# Altium PCB Placa de alimentação.PcbDoc
Units mm, origin at the board's own origin, x right, y up, seen from the top; angles counter-clockwise.
Board outline 62.09 x 55.59 mm, 2 copper layers (Top Layer, Bottom Layer); 20 components, 10 nets, 43 pads, 2 vias.
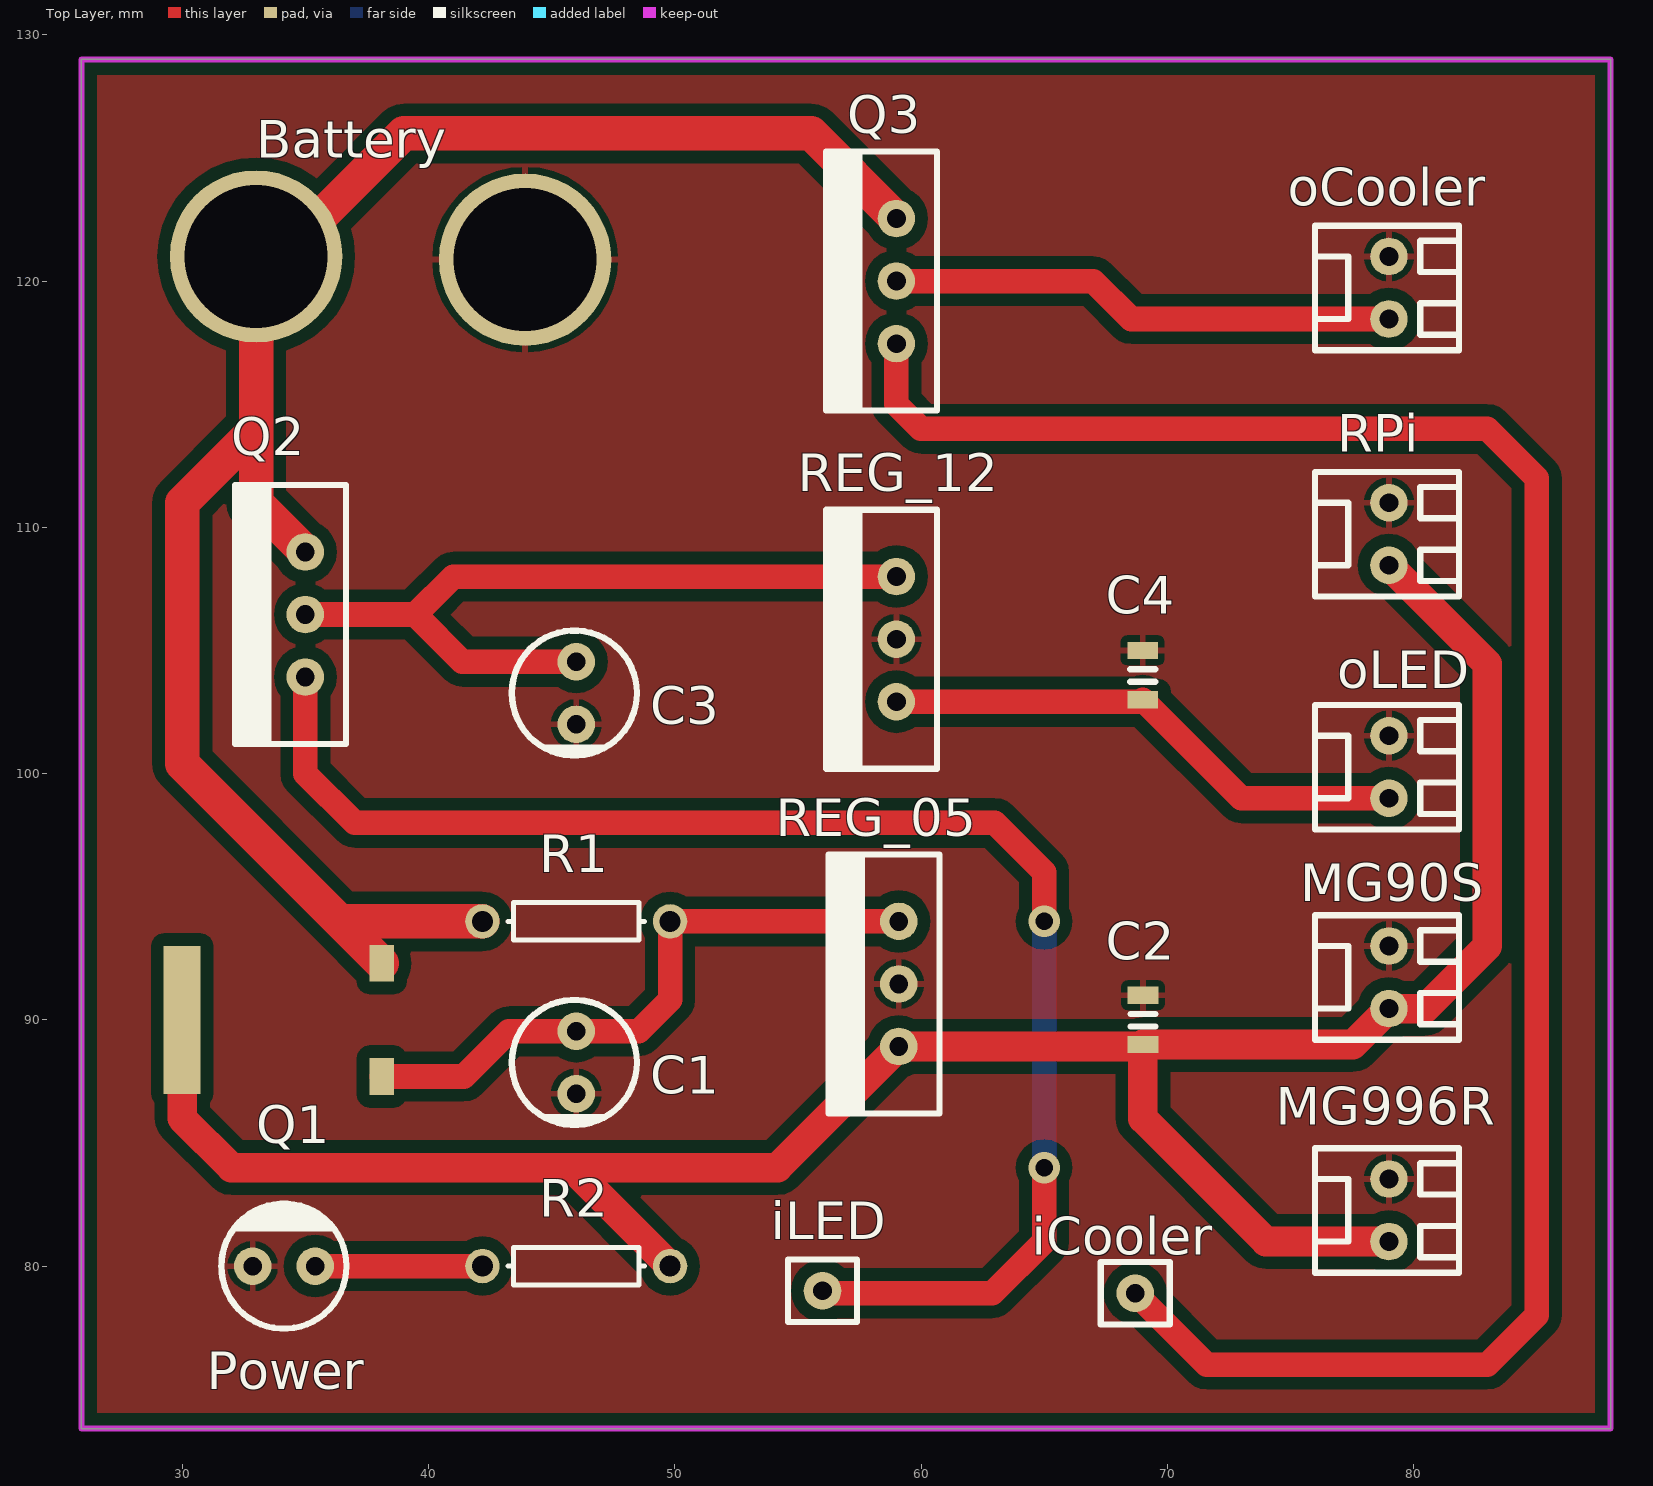
[diagram p0: Top Layer view]
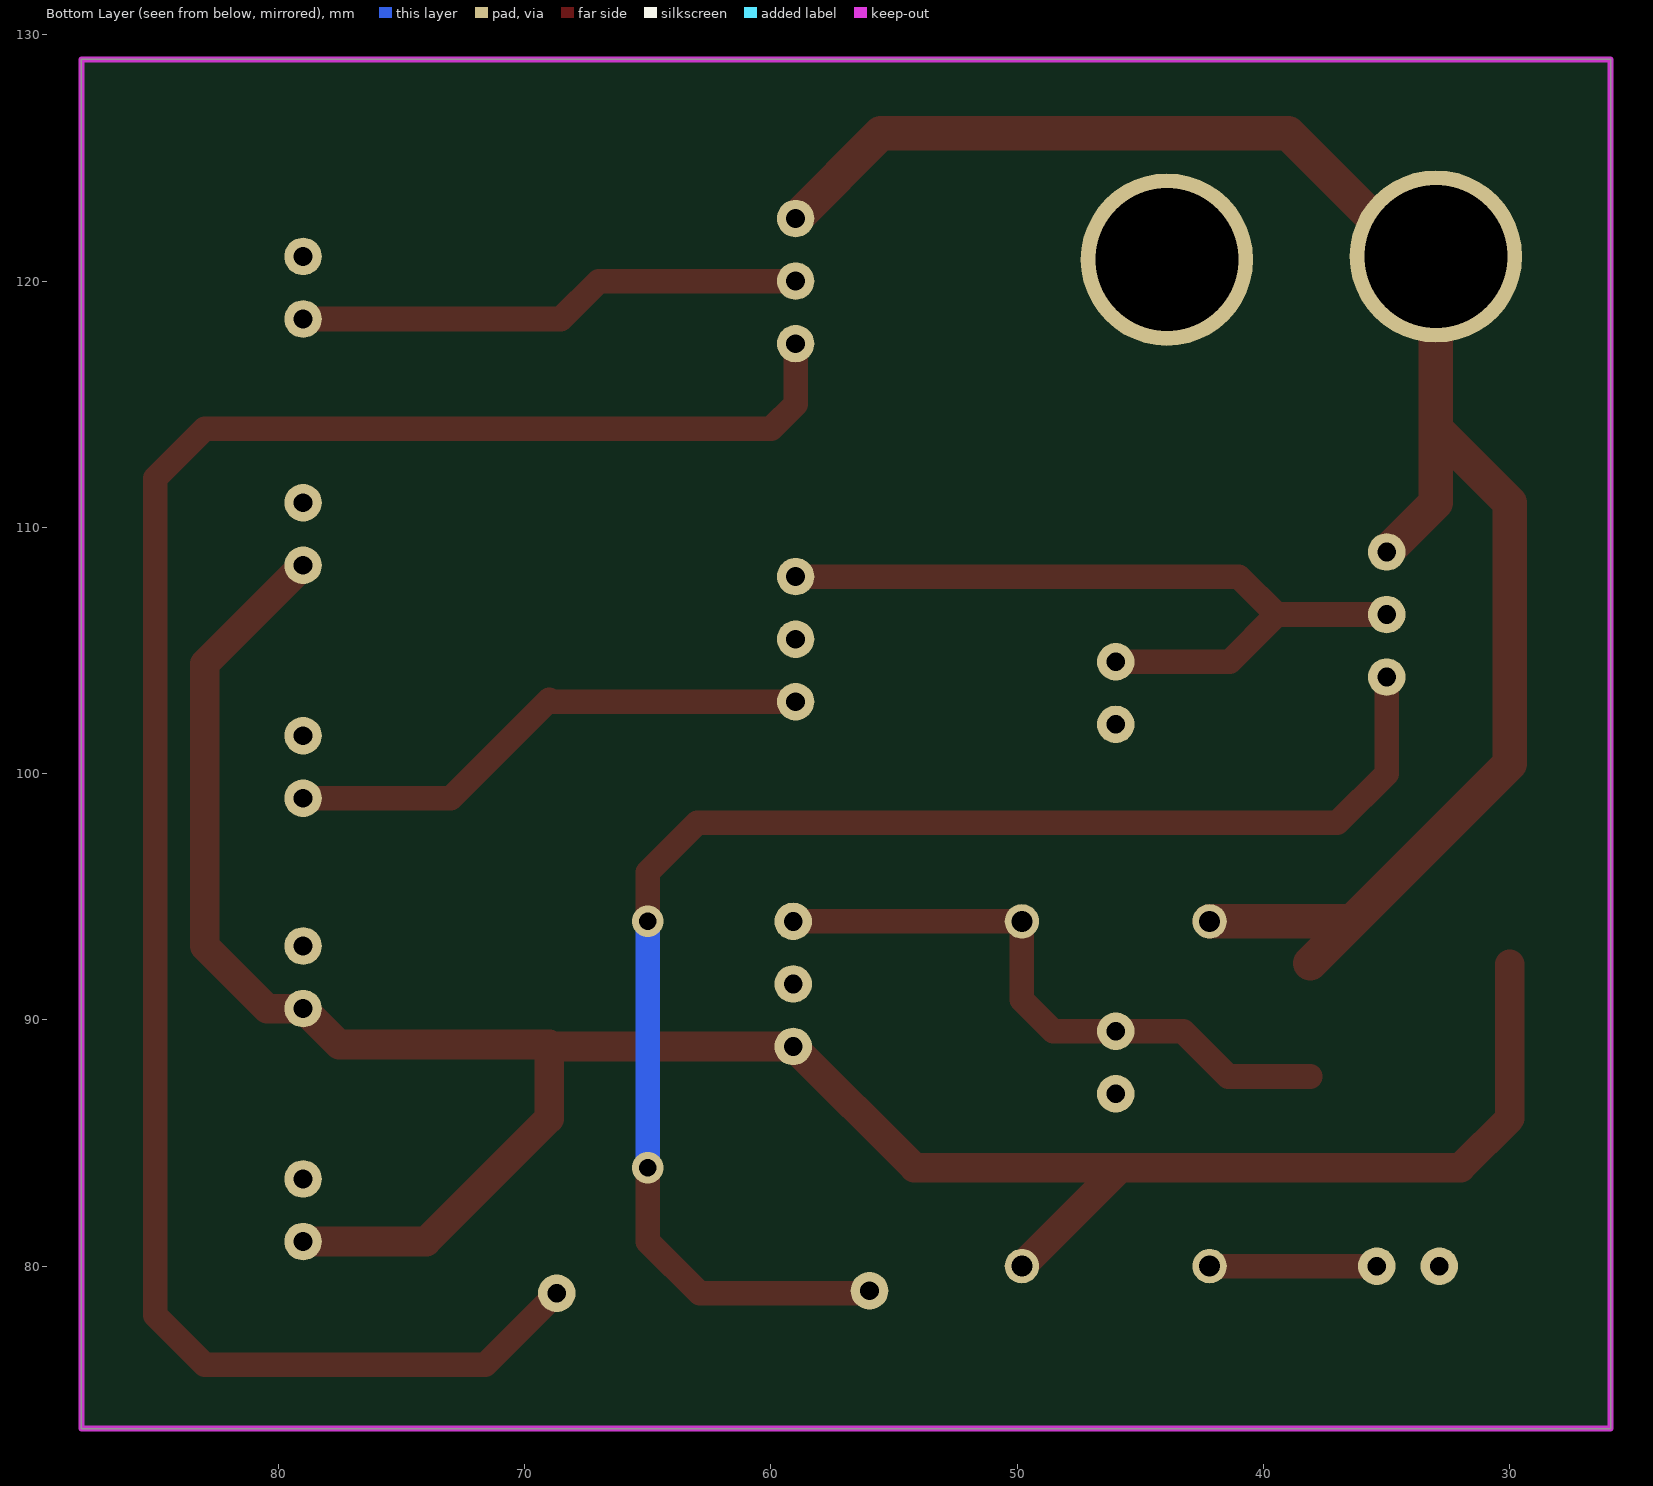
[diagram p1: Bottom Layer view, seen from below]
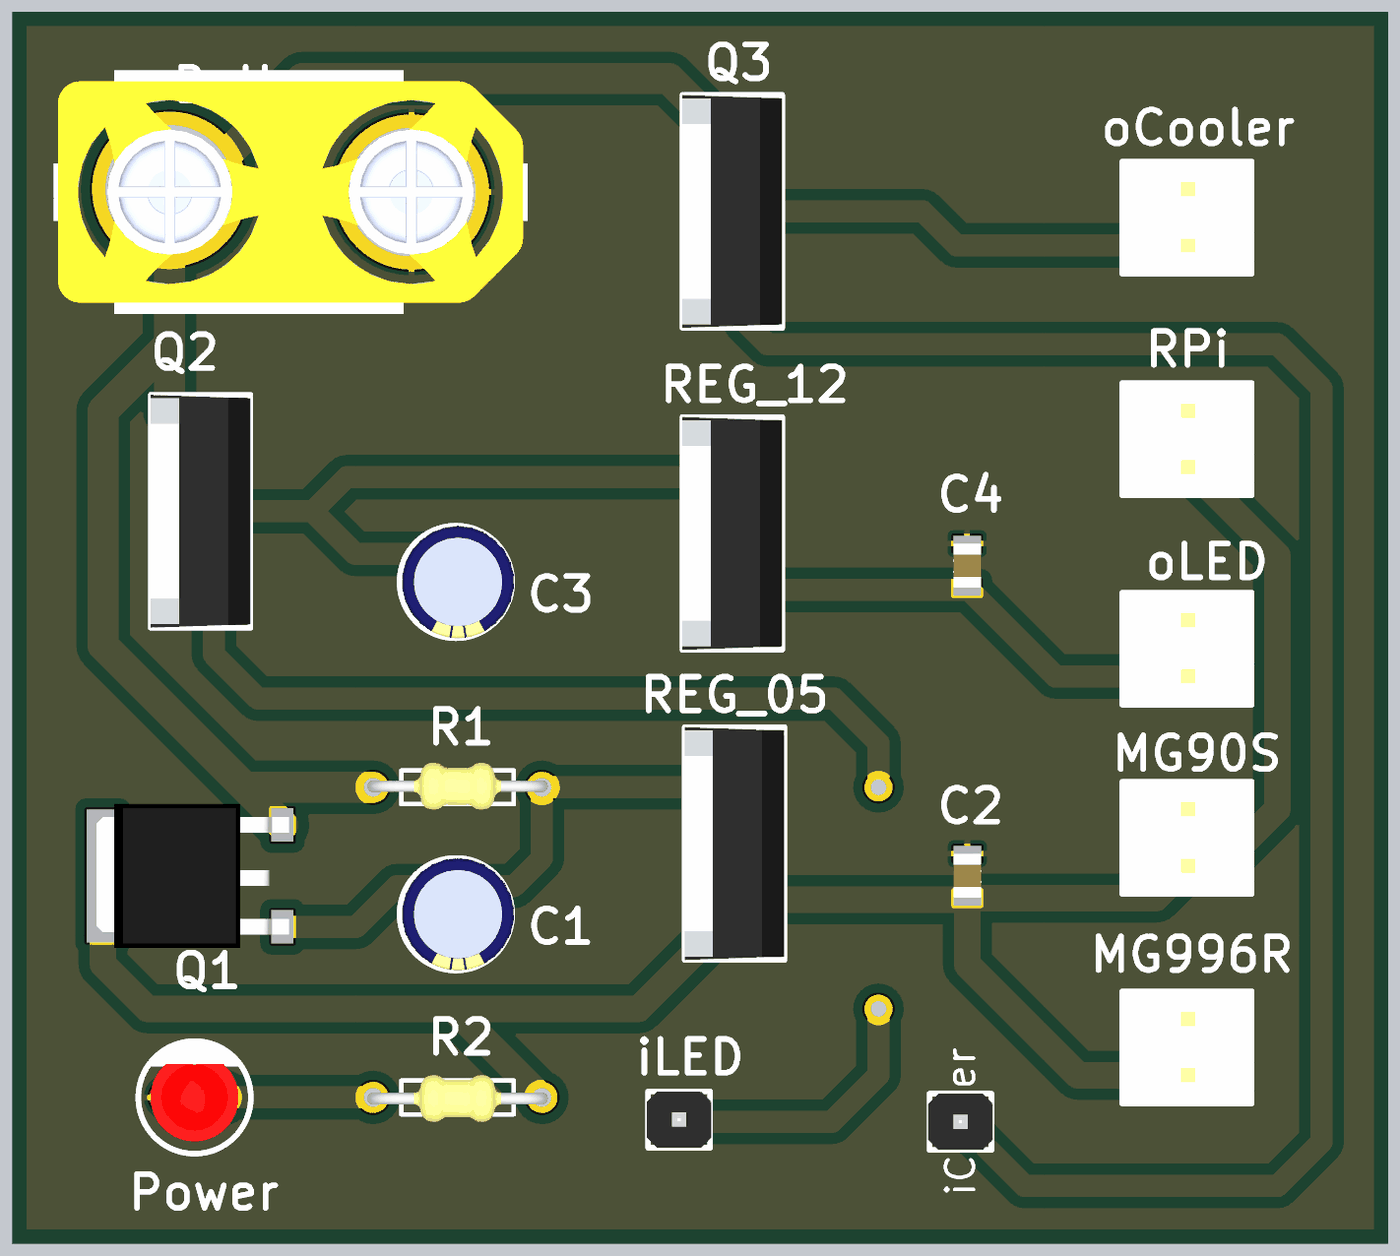
[diagram p2: 3D render of the assembled board from above, using the file's embedded part models]

## Layer stack, top to bottom
Top Solder: solder mask 0.0102, Solder Resist, Dk 3.5
Top Layer: signal copper 0.0356
Dielectric 1: dielectric 0.32, FR-4, Dk 4.8
Bottom Layer: signal copper 0.0356
Bottom Solder: solder mask 0.0102, Solder Resist, Dk 3.5

## Board outline
25.908,73.406 25.908,129 88,129 88,73.406

## Design rules (kind name [scope] priority, off if disabled: settings)
Clearance [All] p1: gap=0.5 ignorepadtopadclearanceinfootprint=FALSE except(0: Arc-Hole Track-Hole SMDPad-Hole THPad-Hole Via-Hole Fill-Hole Poly-Hole Region-Hole Text-Hole)
PolygonConnect [All] p1: connectstyle=Relief reliefconductorwidth=0.254 reliefentries=4 polygonreliefangle="90 Angle" airgapwidth=0.254
RoutingVias [All] p1: holewidth=0.711 width=1.27 viastyle="Through Hole" minholewidth=0.711 minwidth=1.27 maxholewidth=0.711 maxwidth=1.27
SolderMaskExpansion [All] p1: expansion=0.102
Width [All] p1: maxlimit=1.4 minlimit=0.254 preferedwidth=0.7
30 further rules are at their usual default settings.

## Components (designator, comment, footprint, x,y, rotation, side; value= is the part's Value field where it differs from the comment)
Battery "*" XT90 33,121 r0 top
C1 "*" "Eletrolytic Capacitor 5x5mm" 46,89.54 r270 top value=0.33uF
C2 "*" "SMD Capacitor" 69.012,91 r0 top value=0.1uF
C3 "*" "Eletrolytic Capacitor 5x5mm" 46,104.54 r270 top
C4 "*" "SMD Capacitor" 69,105 r0 top
iCooler "*" "HEADER 1X1 8.5MM" 68.7,78.9 r90 top
iLED "*" "HEADER 1X1 8.5MM" 56,79 r90 top
MG90S "*" KK2 79,90.46 r90 top
MG996R "*" KK2 79,81 r90 top
oCooler "*" KK2 79,118.46 r90 top
oLED "*" KK2 79,99 r90 top
Power "LED 5mm THT" "LED THT" 35.4,80 r180 top (schematic designator LED_t)
Q1 "Mosfet P" TO-252-3 38.1,87.7 r90 top
Q2 "*" TO-220 35,109 r270 top
Q3 "*" TO-220 59,122.54 r270 top
R1 "Resistor THT" "RESISTOR THT 5mm" 46,94 r0 top value=1K
R2 "Resistor THT" "RESISTOR THT 5mm" 46,80 r180 top value=330
REG_05 "78XX TO-220" TO-220 59.1,94 r270 top
REG_12 "78XX TO-220" TO-220 59,108 r270 top
RPi "*" KK2 79,108.46 r90 top

## Footprints (in the part's own frame and the unit in brackets; to place one, negate y for a bottom-side part, rotate by r counter-clockwise, add the part's x,y. Pads: shape width x height; smd on the part's side, far side on the other; paste and mask are expansions set on the pad)
"Eletrolytic Capacitor 5x5mm" [mil]
  round 60 hole 30: 1(0,0) 2(100,0)
  silkscreen extent -50,-103 150,97, body extent -50,-99 150,101, height 520
"HEADER 1X1 8.5MM" [mil] "Stackable 1 pin header"
  round 60 hole 30: 1(0,0)
  silkscreen extent -50,-55 50,55, body extent -50,-57 50,57, height 335
KK2 [mil] "KK Conector, 2 ways"
  round 60 hole 30: 1(0,0) 2(100,0)
  silkscreen extent -50,-112 149,118, body extent -50,-116 150,114, height 468
"LED THT" [mil]
  round 60 hole 30: 1(0,0) 2(100,0)
  silkscreen extent -50,-100 150,100, body extent -28,-59 129,79, height 212
"RESISTOR THT 5mm" [mm]
  round 1.4 hole 0.85: 1(-3.81,0) 2(3.81,0)
  silkscreen extent -2.77,-0.76 2.77,0.76, body extent -4.07,-1 4.07,1.1, height 2.55
"SMD Capacitor" [mm]
  rect 1.25x0.7 smd: 1(0,0) 2(0,-2)
  silkscreen extent -0.51,-1.27 0.51,-0.76, body extent -0.63,-1.99 0.62,0.01, height 1
TO-220 [mil] "TO-220 coupling"
  round 60 hole 30: 1(0,0) 2(100,0) 3(200,0)
  silkscreen extent -107,-112 307,65, body extent -107,-112 307,65, height 810
TO-252-3 [mm]
  rect 1.5x1 smd: 1(0,0) 3(4.6,0)
  rect 6x1.5 smd: 2(2.3,8.1)
  body extent -0.95,-0.3 5.55,8.4, height 2.3
XT90 [mm]
  round 7 hole 5.8 mask+0.102: 1(0,0)
  round 7 hole 5.8: 2(10.922,-0.127)
  body extent -5.24,-5.63 16.16,5.37, height 20.7

## Part data
Battery: library part XT90
C1 C3: library part "Electrolytic Capacitor 0.33uF"
C2 C4: library part "Capacitor SMD 0805"
iCooler iLED: library part "Male Pin Head 1x1"
MG90S MG996R oCooler oLED RPi: library part KK2, "KK Connector, 2 ways"
Q2 Q3: library part "NPN Transistor TO-220"

## Via types
v1: diameter 1.27, hole 0.711, Top Layer to Bottom Layer, 2 vias

## Nets (pads, with @x,y where several pads share a name; then routed paths per layer and width w, separated by ;. In a path a pad name is that pad's centre, name@x,y a point inside that pad or via, vN(x,y) a via of type N, cw(c..) or ccw(c..) an arc to the next point about the centre after c; other vN are vias at no path point)
5V: C2.2 MG90S.1 MG996R.1 Q1.2 R2.1 REG_05.3 RPi.1 | length 101.6
  Top Layer w1.2: Q1.2@30,92.25 Q1.2 30,86 32,84 45.81,84 ; R2.1 45.81,84 ; MG996R.1 74,81 69.012,85.988 C2.2 ; RPi.1 83,104.46 83,93 80.46,90.46 MG90S.1 77.54,89 C2.2 ; 45.81,84 54.18,84 REG_05.3 68.932,88.92 C2.2
C_Cooler: iCooler.1 Q3.3 | length 82
  Top Layer w1: Q3.3 59,115 60,114 83,114 85,112 85,78 83,76 71.6,76 iCooler.1
C_LED: iLED.1 Q2.3 | length 60.4
  Top Layer w1: Q2.3 35,100 37,98 63,98 65,96 v1(65,94) ; iLED.1@56,78.9 62.9,78.9 65,81 v1(65,84)
  Bottom Layer w1: v1(65,84) v1(65,94)
Cooler: oCooler.1 Q3.2 | length 20.6
  Top Layer w1: Q3.2 67,120 68.54,118.46 oCooler.1
Gate: C1.1 Q1.1 R1.2 REG_05.1 | length 26
  Top Layer w1: Q1.1 41.43,87.7 43.27,89.54 C1.1 48.54,89.54 49.81,90.81 R1.2 REG_05.1 58.9,94 REG_05.1@59.1,93.8
GND: Battery.2 C1.2 C2.1 C3.2 C4.1 MG90S.2 MG996R.2 oCooler.2 oLED.2 Power.2 REG_05.2 REG_12.2 RPi.2
LED: C4.2 oLED.1 REG_12.3 | length 21.7
  Top Layer w1: REG_12.3 68.92,102.92 C4.2 73,99 oLED.1
NetC3_1: C3.1 Q2.2 REG_12.1 | length 32
  Top Layer w1: Q2.2 39.46,106.46 ; C3.1 41.38,104.54 39.46,106.46 ; REG_12.1 41,108 39.46,106.46
NetPower_1: Power.1 R2.2 | length 6.8
  Top Layer w1: Power.1 R2.2
VCC: Battery.1 Q1.3 Q2.1 Q3.1 R1.1 | length 74.4
  Top Layer w1.2: Battery.1 Battery.1@34,121
  Top Layer w1.4: Battery.1 33,114 ; Battery.1@34,121 39,126 55.54,126 Q3.1 ; Q2.1 33,111 33,114 ; Q1.3 36.4,94 ; R1.1 36.4,94 ; 33,114 30,111 30,100.4 36.4,94

## Polygon pours and split planes (outlines as drawn)
GND on Top Layer "Top Layer-GND" (solid, remove dead copper, pour order 8): 21.891,132.14 19.891,130.14 19.891,69.14 92.891,69.14 92.891,132.14

## Keep-outs
Keep-Out Layer:
  the board outline again, w0.254